# Altium PCB STM32F446RE_PCB.PcbDoc
Units mil, origin at the board's own origin, x right, y up, seen from the top; angles counter-clockwise.
Board outline 2480.31 x 1496.06 mil, 2 copper layers (Top Layer, Bottom Layer); 1 components, 0 nets, 120 pads, 0 vias.
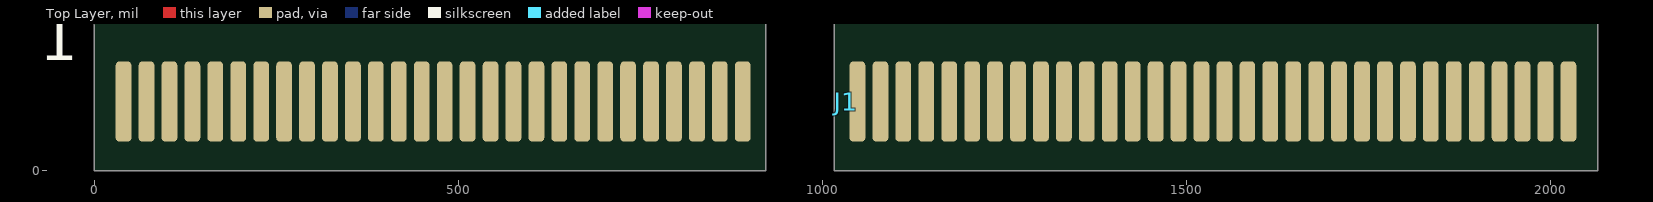
[diagram p0: Top Layer view]
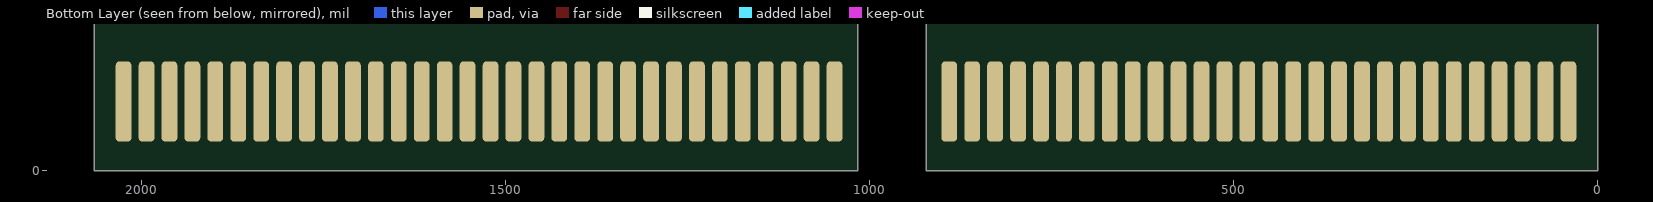
[diagram p1: Bottom Layer view, seen from below]

## Layer stack, top to bottom
Top Solder: solder mask 0.4, Solder Resist, Dk 3.5
Top Layer: signal copper 1.4
Dielectric 1: dielectric 12.6, FR-4, Dk 4.8
Bottom Layer: signal copper 1.4
Bottom Solder: solder mask 0.4, Solder Resist, Dk 3.5

## Board outline
-0.26,-0.05 -0.26,196.8 ccw(c-39.63,196.8) -39.63,236.17 -267.98,236.17 cw(c-267.98,275.54) -307.35,275.54 -307.35,1377.9 cw(c-189.24,1377.9) -189.24,1496.01 2054.86,1496.01 cw(c2054.86,1377.9) 2172.97,1377.9 2172.97,275.54 cw(c2133.6,275.54) 2133.6,236.17 2103.68,236.17 ccw(c2103.68,196.8) 2064.31,196.8 2064.31,-0.05 1016.27,-0.05 1016.27,204.68 ccw(c969.03,204.68) 921.79,204.68 921.79,-0.05

## Design rules (kind name [scope] priority, off if disabled: settings)
Clearance [All] p1: gap=10 ignorepadtopadclearanceinfootprint=FALSE except(0: Arc-Hole Track-Hole SMDPad-Hole THPad-Hole Via-Hole Fill-Hole Poly-Hole Region-Hole Text-Hole)
PolygonConnect [All] p1: connectstyle=Relief reliefconductorwidth=10 reliefentries=4 polygonreliefangle="90 Angle" airgapwidth=10
RoutingVias [All] p1: holewidth=28 width=50 viastyle="Through Hole" minholewidth=28 minwidth=50 maxholewidth=28 maxwidth=50
SolderMaskExpansion [All] p1: expansion=4
Width [All] p1: maxlimit=10 minlimit=10 preferedwidth=10
30 further rules are at their usual default settings.

## Components (designator, comment, footprint, x,y, rotation, side; value= is the part's Value field where it differs from the comment)
J1 "HSEC8-160-01-S-DV-A-K-TR" SAMTEC_HSEC8-160-01-S-DV-A-K-TR 40226,40890 r0 top locked

## Footprints (in the part's own frame and the unit in brackets; to place one, negate y for a bottom-side part, rotate by r counter-clockwise, add the part's x,y. Pads: shape width x height; smd on the part's side, far side on the other; paste and mask are expansions set on the pad)
SAMTEC_HSEC8-160-01-S-DV-A-K-TR [mm]
  rrect50% 0.55x2.8 smd: 1(-1020.724,-1036.193) 2(-1019.924,-1036.193) 29(-995.124,-1036.193) 30(-994.324,-1036.193)
  rrect50% 0.55x2.8 smd paste+0: 3(-1019.124,-1036.193) 4(-1018.324,-1036.193) 5(-1017.524,-1036.193) 6(-1016.724,-1036.193) 7(-1015.924,-1036.193) 8(-1015.124,-1036.193) 9(-1014.324,-1036.193) 10(-1013.524,-1036.193) 11(-1012.724,-1036.193) 12(-1011.924,-1036.193) 13(-1011.124,-1036.193) 14(-1010.324,-1036.193) 15(-1009.524,-1036.193) 16(-1008.724,-1036.193) 17(-1007.924,-1036.193) 18(-1007.124,-1036.193) 19(-1006.324,-1036.193) 20(-1005.524,-1036.193) 21(-1004.724,-1036.193) 22(-1003.924,-1036.193) 23(-1003.124,-1036.193) 24(-1002.324,-1036.193) 25(-1001.524,-1036.193) 26(-1000.724,-1036.193) 27(-999.924,-1036.193) 28(-999.124,-1036.193) 31(-993.524,-1036.193) 32(-992.724,-1036.193) 33(-991.924,-1036.193) 34(-991.124,-1036.193) 35(-990.324,-1036.193) 36(-989.524,-1036.193) 37(-988.724,-1036.193) 38(-987.924,-1036.193) 39(-987.124,-1036.193) 40(-986.324,-1036.193) 41(-985.524,-1036.193) 42(-984.724,-1036.193) 43(-983.924,-1036.193) 44(-983.124,-1036.193) 45(-982.324,-1036.193) 46(-981.524,-1036.193) 47(-980.724,-1036.193) 48(-979.924,-1036.193) 49(-979.124,-1036.193) 50(-978.324,-1036.193) 51(-977.524,-1036.193) 52(-976.724,-1036.193) 53(-975.924,-1036.193) 54(-975.124,-1036.193) 55(-974.324,-1036.193) 56(-973.524,-1036.193) 57(-972.724,-1036.193) 58(-971.924,-1036.193) 59(-971.124,-1036.193) 60(-970.324,-1036.193)
  rrect50% 0.55x2.8 smd far side: 61(-1020.724,-1036.193) 62(-1019.924,-1036.193) 89(-995.124,-1036.193) 90(-994.324,-1036.193)
  rrect50% 0.55x2.8 smd far side paste+0: 63(-1019.124,-1036.193) 64(-1018.324,-1036.193) 65(-1017.524,-1036.193) 66(-1016.724,-1036.193) 67(-1015.924,-1036.193) 68(-1015.124,-1036.193) 69(-1014.324,-1036.193) 70(-1013.524,-1036.193) 71(-1012.724,-1036.193) 72(-1011.924,-1036.193) 73(-1011.124,-1036.193) 74(-1010.324,-1036.193) 75(-1009.524,-1036.193) 76(-1008.724,-1036.193) 77(-1007.924,-1036.193) 78(-1007.124,-1036.193) 79(-1006.324,-1036.193) 80(-1005.524,-1036.193) 81(-1004.724,-1036.193) 82(-1003.924,-1036.193) 83(-1003.124,-1036.193) 84(-1002.324,-1036.193) 85(-1001.524,-1036.193) 86(-1000.724,-1036.193) 87(-999.924,-1036.193) 88(-999.124,-1036.193) 91(-993.524,-1036.193) 92(-992.724,-1036.193) 93(-991.924,-1036.193) 94(-991.124,-1036.193) 95(-990.324,-1036.193) 96(-989.524,-1036.193) 97(-988.724,-1036.193) 98(-987.924,-1036.193) 99(-987.124,-1036.193) 100(-986.324,-1036.193) 101(-985.524,-1036.193) 102(-984.724,-1036.193) 103(-983.924,-1036.193) 104(-983.124,-1036.193) 105(-982.324,-1036.193) 106(-981.524,-1036.193) 107(-980.724,-1036.193) 108(-979.924,-1036.193) 109(-979.124,-1036.193) 110(-978.324,-1036.193) 111(-977.524,-1036.193) 112(-976.724,-1036.193) 113(-975.924,-1036.193) 114(-975.124,-1036.193) 115(-974.324,-1036.193) 116(-973.524,-1036.193) 117(-972.724,-1036.193) 118(-971.924,-1036.193) 119(-971.124,-1036.193) 120(-970.324,-1036.193)

## Part data
J1: "0.80 mm High-Speed Edge Card Connector, Vertical", Package=None, Availability="In Stock", Check_prices=https://www.snapeda.com/parts/HSEC8-160-01-S-DV-A-K-TR/Samtec/view-part/?ref=eda, MF=Samtec, MP=HSEC8-160-01-S-DV-A-K-TR, Price=None, Purchase-URL=https://pricing.snapeda.com/search/part/HSEC8-160-01-S-DV-A-K-TR/?ref=eda, SnapEDA_Link=https://www.snapeda.com/parts/HSEC8-160-01-S-DV-A-K-TR/Samtec/view-part/?ref=snap

## Nets (pads, with @x,y where several pads share a name; then routed paths per layer and width w, separated by ;. In a path a pad name is that pad's centre, name@x,y a point inside that pad or via, vN(x,y) a via of type N, cw(c..) or ccw(c..) an arc to the next point about the centre after c; other vN are vias at no path point)
pads on no net: J1.1 J1.2 J1.3 J1.4 J1.5 J1.6 J1.7 J1.8 J1.9 J1.10 J1.11 J1.12 J1.13 J1.14 J1.15 J1.16 J1.17 J1.18 J1.19 J1.20 J1.21 J1.22 J1.23 J1.24 J1.25 J1.26 J1.27 J1.28 J1.29 J1.30 J1.31 J1.32 J1.33 J1.34 J1.35 J1.36 J1.37 J1.38 J1.39 J1.40 J1.41 J1.42 J1.43 J1.44 J1.45 J1.46 J1.47 J1.48 J1.49 J1.50 J1.51 J1.52 J1.53 J1.54 J1.55 J1.56 J1.57 J1.58 J1.59 J1.60 J1.61 J1.62 J1.63 J1.64 J1.65 J1.66 J1.67 J1.68 J1.69 J1.70 J1.71 J1.72 J1.73 J1.74 J1.75 J1.76 J1.77 J1.78 J1.79 J1.80 J1.81 J1.82 J1.83 J1.84 J1.85 J1.86 J1.87 J1.88 J1.89 J1.90 J1.91 J1.92 J1.93 J1.94 J1.95 J1.96 J1.97 J1.98 J1.99 J1.100 J1.101 J1.102 J1.103 J1.104 J1.105 J1.106 J1.107 J1.108 J1.109 J1.110 J1.111 J1.112 J1.113 J1.114 J1.115 J1.116 J1.117 J1.118 J1.119 J1.120

## Silkscreen, mask and mechanical layers (free items; w line width, h text height)
Mechanical 3:
  lines w0.5: -287.66,275.54 ccw(c-267.98,275.54) -267.98,255.86 -39.63,255.86 cw(c-39.63,196.8) 19.42,196.8 19.42,19.64 902.1,19.64 902.1,204.68 cw(c969.03,204.68) 1035.96,204.68 1035.96,19.64 2044.62,19.64 2044.62,196.8 cw(c2103.68,196.8) 2103.68,255.86 2133.6,255.86 ccw(c2133.6,275.54) 2153.28,275.54 2153.28,1377.9 ccw(c2054.86,1377.9) 2054.86,1476.33 -189.24,1476.33 ccw(c-189.24,1377.9) -287.66,1377.9 -287.66,275.54
Mechanical 13:
  lines w0.5: -0.13,197.34 -0.13,0.49 921.92,0.49 921.92,205.21 cw(c969.16,205.21) 1016.41,205.21 1016.41,0.49 2064.44,0.49 2064.44,197.34 ; -307.35,275.54 ccw(c-267.98,275.54) -267.98,236.17 -39.63,236.17 cw(c-39.63,196.8) -0.26,196.8 -0.26,-0.05 921.79,-0.05 921.79,204.68 cw(c969.03,204.68) 1016.27,204.68 1016.27,-0.05 2064.31,-0.05 2064.31,196.8 cw(c2103.68,196.8) 2103.68,236.17 2133.6,236.17 ccw(c2133.6,275.54) 2172.97,275.54 2172.97,1377.9 ccw(c2054.86,1377.9) 2054.86,1496.01 -189.24,1496.01 ccw(c-189.24,1377.9) -307.35,1377.9 -307.35,275.54